# Altium PCB Power_Board.PcbDoc
Units mm, origin at the board's own origin, x right, y up, seen from the top; angles counter-clockwise.
Board outline 152.4 x 101.6 mm, 4 copper layers (Top Layer, Layer GND, Layer 12V, Bottom Layer), stack 0.603 mm thick; 28 components, 16 nets, 84 pads, 2 vias.
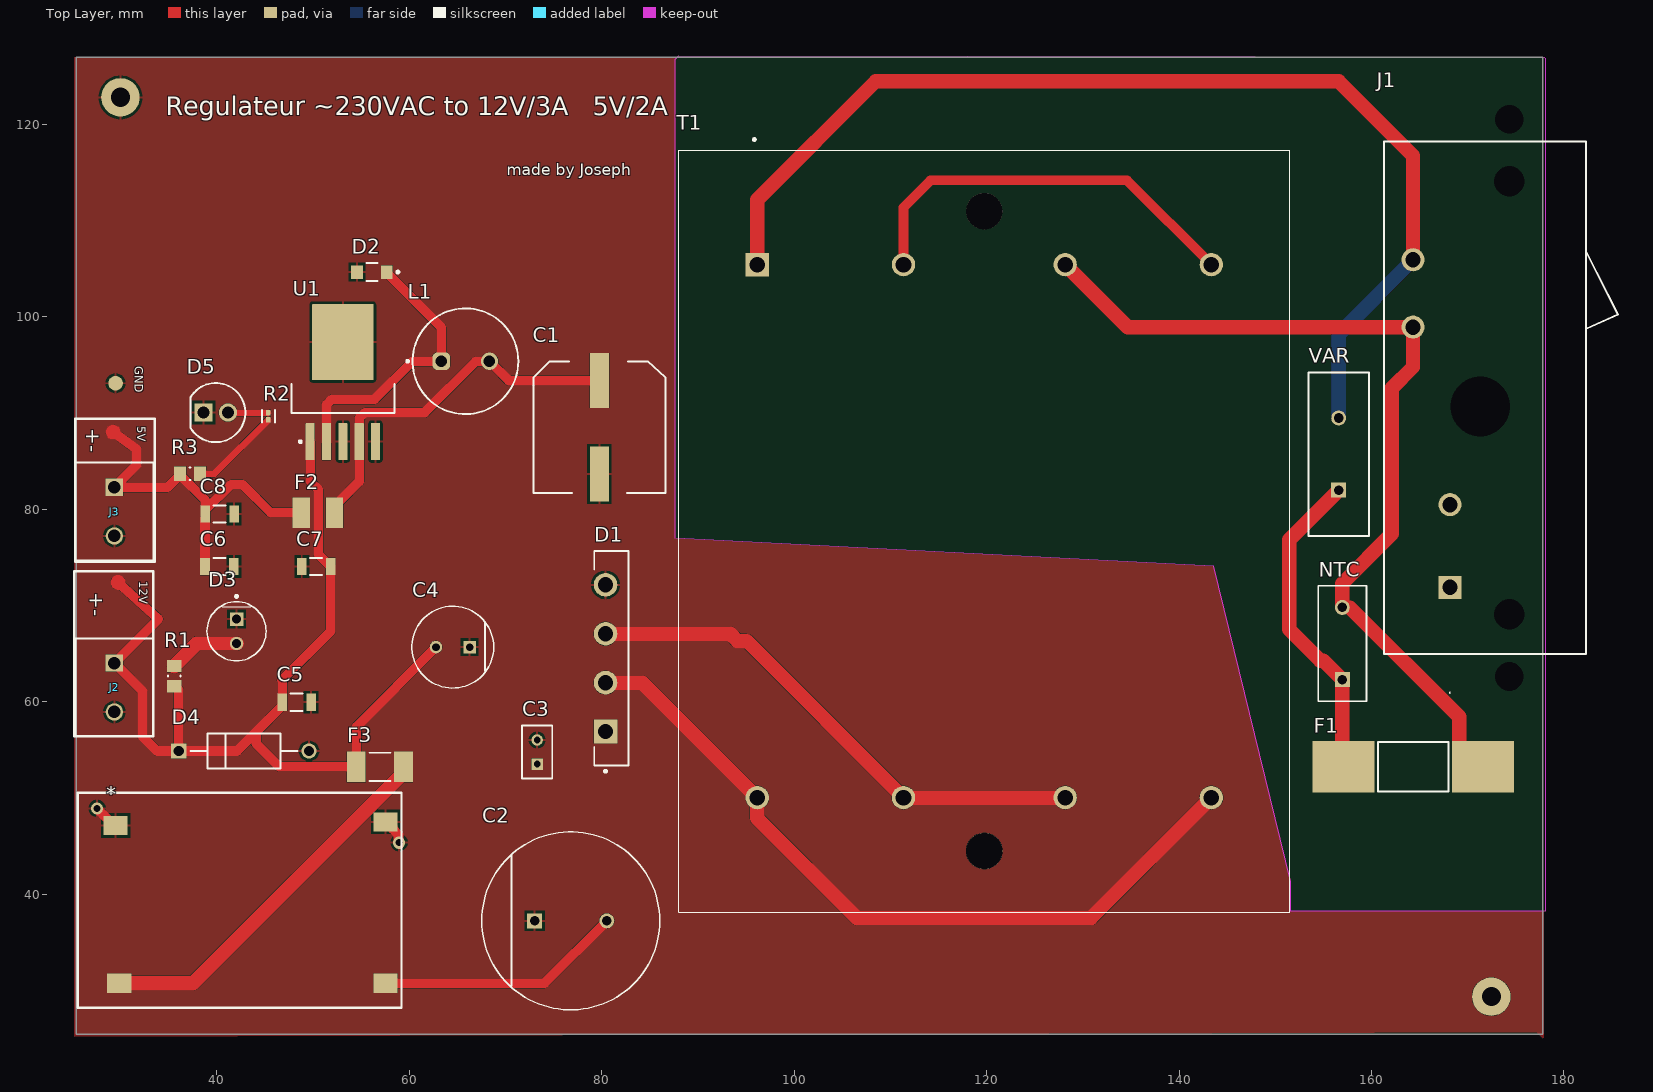
[diagram p0: Top Layer view]
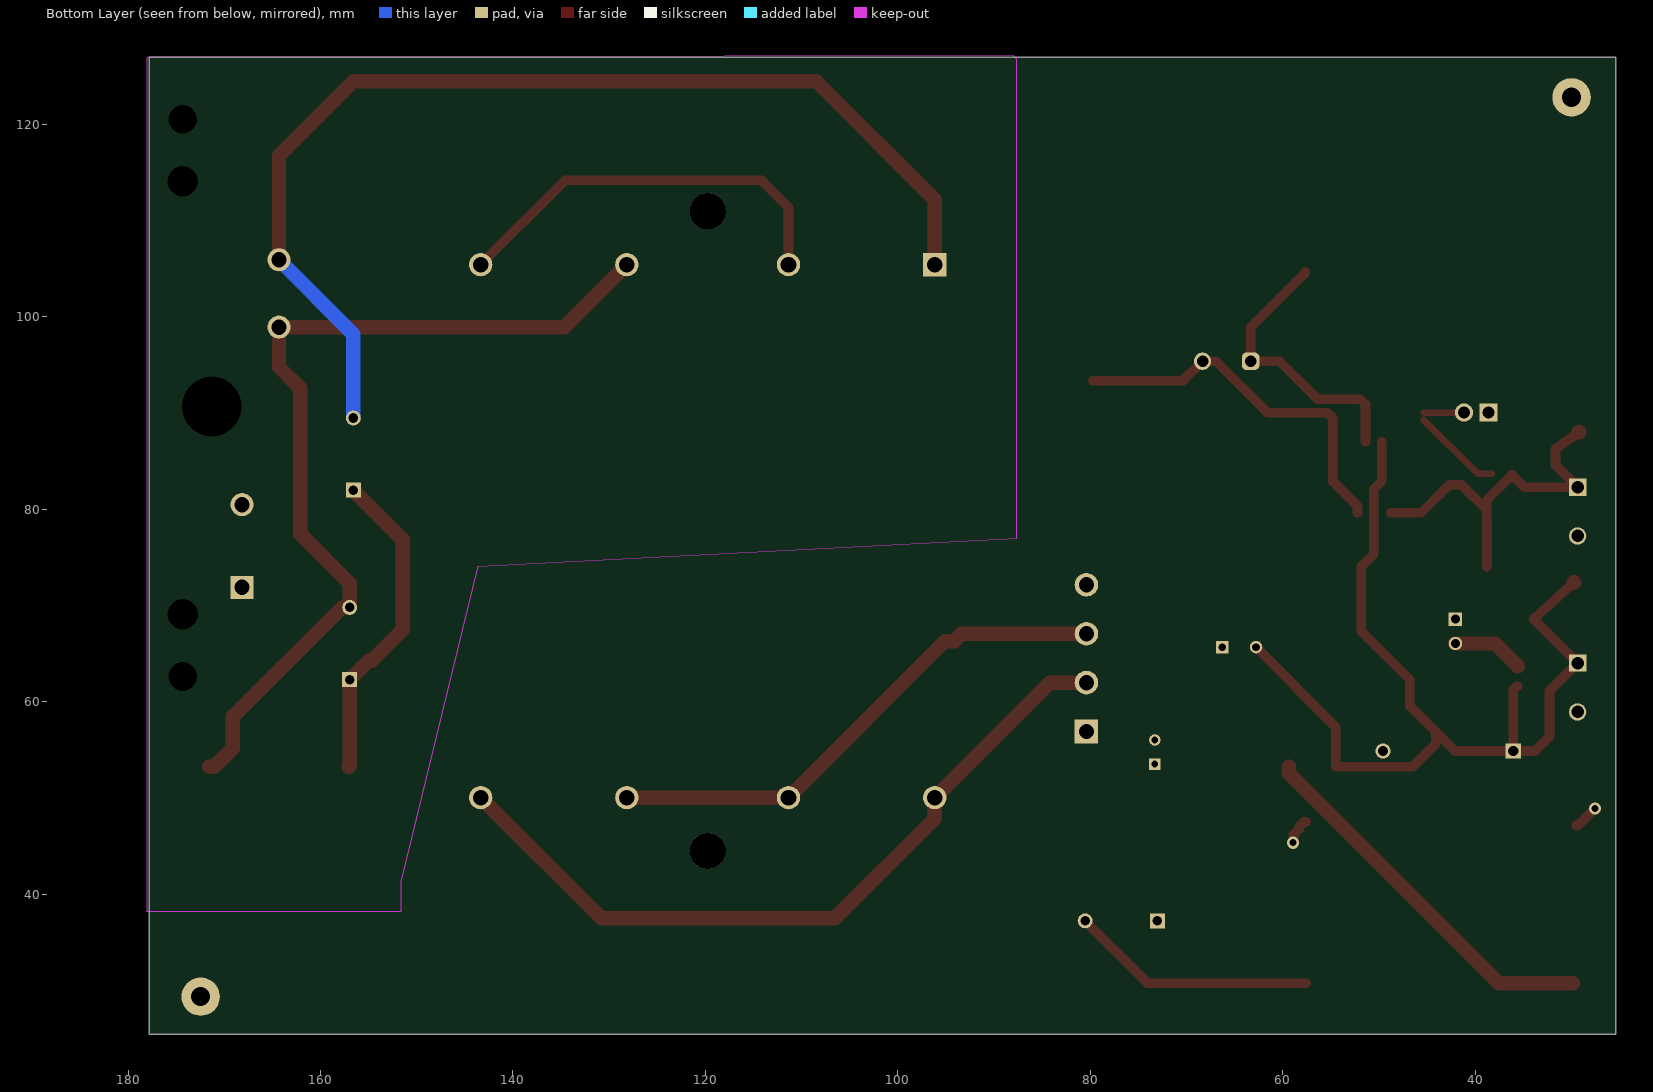
[diagram p1: Bottom Layer view, seen from below]
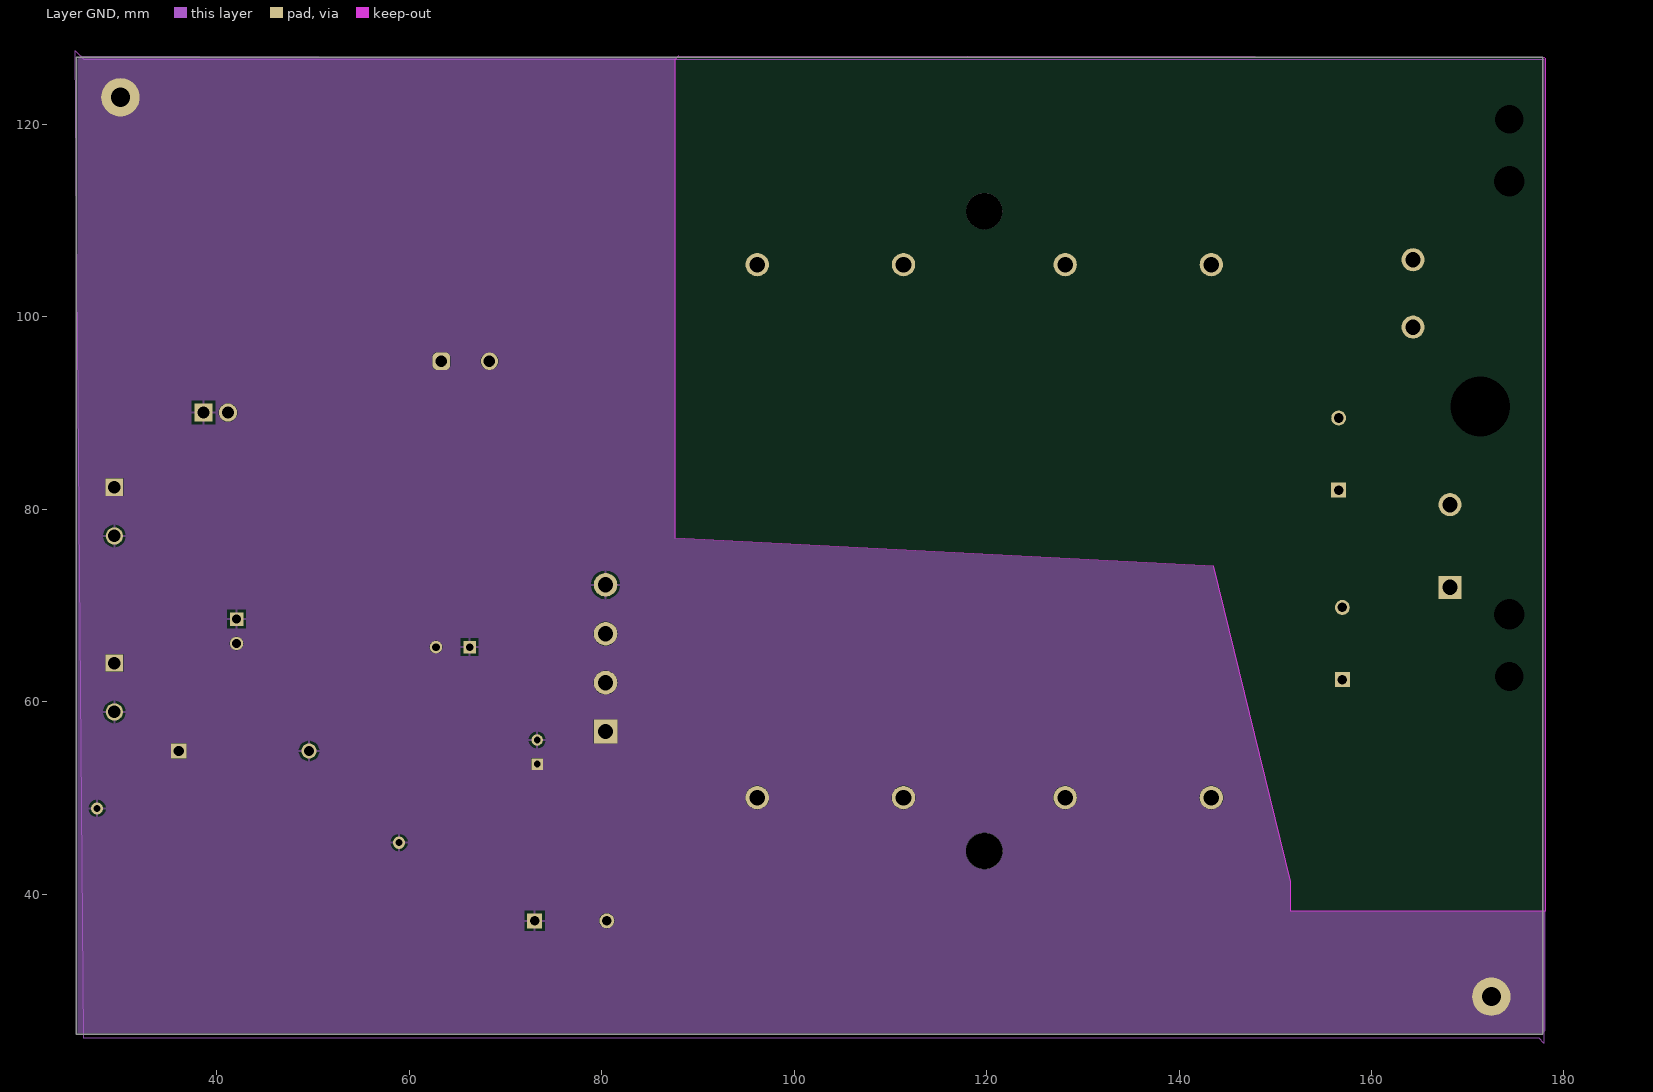
[diagram p2: Layer GND]
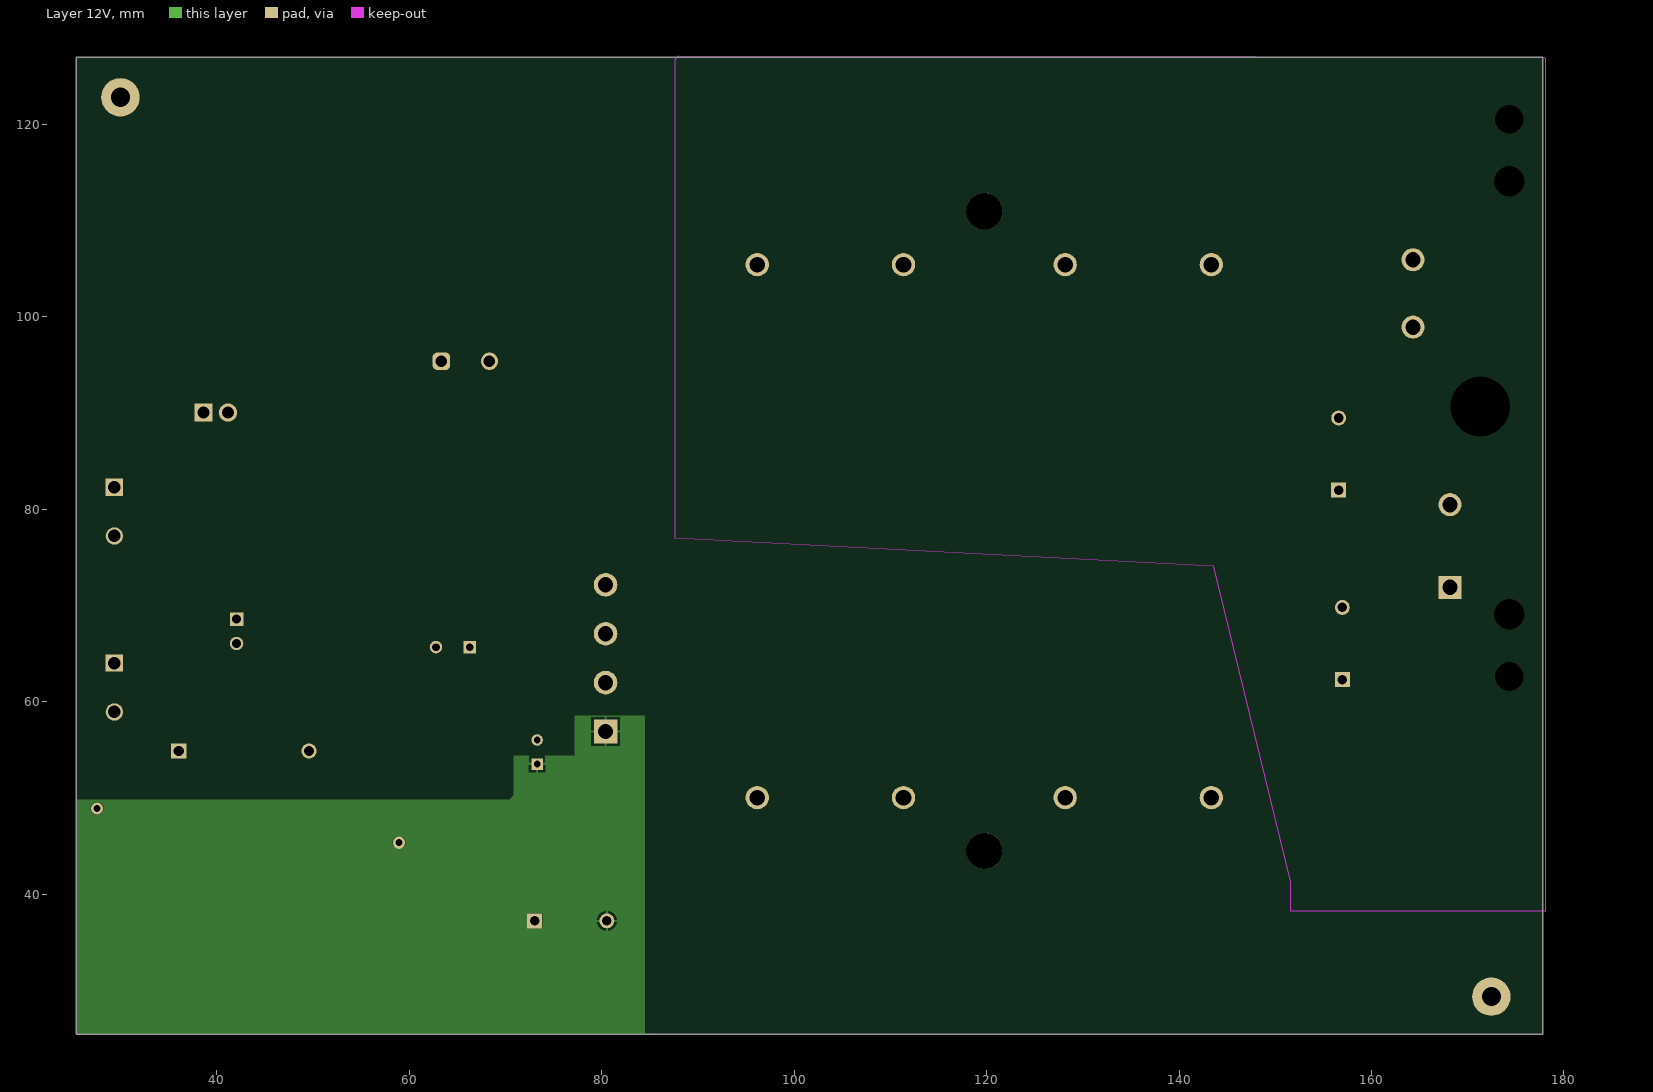
[diagram p3: Layer 12V]
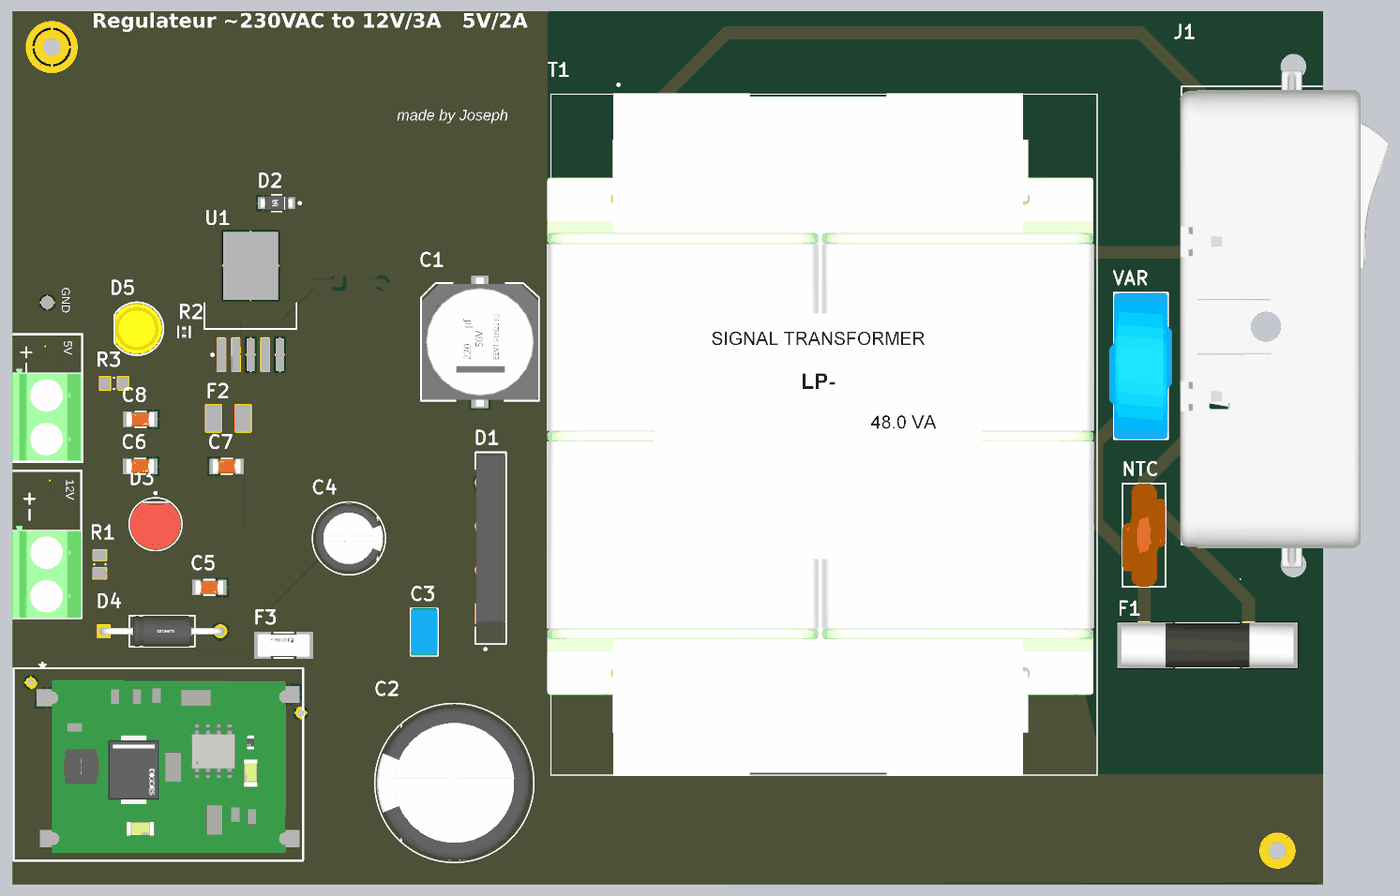
[diagram p4: 3D render of the assembled board from above, using the file's embedded part models]

## Layer stack, top to bottom
Top Solder: solder mask 0.0102, Solder Resist, Dk 3.5
Top Layer: signal copper 0.0356
Dielectric 2: prepreg 0.0711, PP-006, Dk 4.1
Layer GND: signal copper 0.035
Dielectric 1: dielectric 0.32, FR-4, Dk 4.8
Layer 12V: signal copper 0.035
Dielectric 3: prepreg 0.0711, PP-006, Dk 4.1
Bottom Layer: signal copper 0.0356
Bottom Solder: solder mask 0.0102, Solder Resist, Dk 3.5

## Board outline
25.4,25.4 177.8,25.4 177.8,127 25.4,127

## Design rules (kind name [scope] priority, off if disabled: settings)
Clearance "Clearance_L_N  " [InNet('L') vs InNet('N')] p1: gap=3 ignorepadtopadclearanceinfootprint=FALSE
Clearance "Clearance_MAINS  " [InNet('L')or InNet('N') vs NOT (InNet('L') OR InNet('N'))] p2: gap=4 ignorepadtopadclearanceinfootprint=FALSE
PolygonConnect [All] p1: connectstyle=Relief reliefconductorwidth=0.254 reliefentries=4 polygonreliefangle="90 Angle" airgapwidth=0.254
RoutingVias [All] p1: holewidth=0.711 width=1.27 viastyle="Through Hole" minholewidth=0.711 minwidth=1.27 maxholewidth=0.711 maxwidth=1.27
SolderMaskExpansion [All] p1: expansion=0.102 istentingtop=FALSE
Width Width_1 [InNet('+5V') OR InNet('+5VOUT')] p1: maxlimit=2 minlimit=1 preferedwidth=1.2
Width [InNet('+12VOUT') OR InNet('12VREG') OR InNet('+12VREG2')] p2: maxlimit=3 minlimit=1 preferedwidth=2
30 further rules are at their usual default settings.

## Components (designator, comment, footprint, x,y, rotation, side; value= is the part's Value field where it differs from the comment)
* "DC_DC_BUCK_12V_MP1584" DC_DC_BUCK_12V_MP1584 44.069,54.61 r180 top
C1 "EEVTG1H221Q" FP-TGH13-MFG 79.756,88.519 r90 top value=220uF
C2 "ECA1VHG472" FP-RAD-TH-D_18_0_5-L_35_5-MFG 76.775,37.211 r0 top
C3 "RHEL81H155K2A2H03B" FP-RHE2DB-MFG 73.279,54.757 r90 top
C4 "EEUFR1E221" FP-RAD-TH-D_8_0_5-L_11_5-MFG 64.516,65.659 r180 top
C5 "AC1206KKX7R0BB104" FP-AC1206-0_85-MFG 48.284,59.944 r0 top value="100 nF"
C6 "AC1206KKX7R0BB104" FP-AC1206-0_85-MFG 40.259,74.041 r0 top value="100 nF"
C7 "AC1206KKX7R0BB104" FP-AC1206-0_85-MFG 50.316,74.041 r180 top value="100 nF"
C8 "AC1206KKX7R0BB104" FP-AC1206-0_85-MFG 40.283,79.502 r0 top value="100 nF"
D1 "GBU4M-E3/51" FP-GBU4M-E3-51-MFG 80.998,64.516 r270 top
D2 "SS34LWHRVG" FP-SS34LWH-MFG 56.108,104.648 r180 top
D3 "XLUR12D" FP-XLUR12D-MFG 42.037,67.31 r270 top
D4 "TVS 15V" FP-DO-15-MFG 42.799,54.864 r0 top
D5 "SSL-LX5093YD" FP-SSL-LX5093YD-MFG 39.878,90.043 r0 top
F1 "021502.5MXP" LFUS-0215-20X5_L 164.338,53.213 r180 top
F2 "1812L150ZR" LFUS-FUSE1812-71_V 50.493,79.629 r180 top
F3 "0452004.MRL" FP-0452-MFG 56.934,53.213 r180 top value=0.0186Ω
J1 "CMF1.1111.12" CMF1111112 168.163,71.878 r90 top
J2 "1729128" PHOE-1729128-2_V 29.337,61.468 r270 top
J3 "1729128" PHOE-1729128-2_V 29.337,79.756 r270 top
L1 "7447471330" WE-TIS_1111 1335.826,1365.377 r0 top
NTC "NTPAA100LDNB0" FP-NTPAA-MFG 156.972,66.04 r90 top
R1 "3R3 5% 0805(2012)" RESC0805(2012)_M 35.56,62.645 r90 top value="3.30 Ohm"
R2 "0 OHM" FP-CRG0402-IPC_C 45.339,89.657 r90 top
R3 "3R3 5% 0805(2012)" RESC0805(2012)_M 37.211,83.693 r0 top value="3.30 Ohm"
T1 "LP-24-2000" XFMR_LP-24-2000 119.761,77.724 r90 top
U1 "LM2596S-5.0" KTT0005B_L 53.086,93.218 r90 top
VAR "IsoM5-275-B-L2" FP-IsoM5-275-B-L2-MFG 156.591,85.725 r90 top

## Footprints (in the part's own frame and the unit in brackets; to place one, negate y for a bottom-side part, rotate by r counter-clockwise, add the part's x,y. Pads: shape width x height; smd on the part's side, far side on the other; paste and mask are expansions set on the pad)
CMF1111112 [mm]
  rect 2.4x2.4 hole 1.6: 1(0,0)
  round 2.4 hole 1.6: 2(8.6,0) 3(27.05,3.84) 4(34.05,3.84)
  round 3.1 hole 6.2 unplated: 5(18.8,-3.16)
  round 1.5 hole 3 unplated: 6(-9.25,-6.16) 9(48.65,-6.16)
  round 1.6 hole 3.2 unplated: 7(-2.8,-6.16) 8(42.2,-6.16)
  silkscreen extent -11,-17.46 46.35,6.84, body extent -9.65,-17.27 48.25,7.03, height 18.5
DC_DC_BUCK_12V_MP1584 [mm]
  rect 2.5x2 smd mask+0: 1(-13.462,23.876) 2(-13.462,7.112) 3(14.224,23.876) 4(14.605,7.493)
  body extent -13.08,5.46 14.1,25.53, height 2.9
FP-0452-MFG [mil]
  rect 77x124 smd paste+0 mask+0: 1(-96.5,0) 2(96.5,0)
  silkscreen extent -43,-58 43,58, body extent -139,-66 139,66, height 10
FP-AC1206-0_85-MFG [mm]
  rect 1x1.8 smd paste+0 mask+0: 1(-1.5,0) 2(1.5,0)
  silkscreen extent -0.63,-0.9 0.63,0.9, body extent -2.2,-1.25 2.2,1.25, height 0.25
FP-CRG0402-IPC_C [mm]
  rect 0.56x0.472 smd paste+0 mask+0: 1(-0.376,0) 2(0.376,0)
  silkscreen extent -0.66,-0.67 0.66,0.67, body extent -0.76,-0.38 0.76,0.38, height 0.25
FP-DO-15-MFG [mm]
  rect 1.6x1.6 hole 1.05 paste-1000 mask+0: 1(-6.77,0)
  round 1.6 hole 1.05 paste-1000 mask+0: 2(6.77,0)
  silkscreen extent -5.57,-1.8 5.57,1.8, body extent -7.67,-1.9 7.67,1.9, height 0.25
FP-GBU4M-E3-51-MFG [mm]
  rect 2.45x2.45 hole 1.6 paste-1000 mask+0: 1(7.62,-0.607)
  round 2.45 hole 1.6 paste-1000 mask+0: 2(2.54,-0.607) 3(-2.54,-0.607) 4(-7.62,-0.607)
  silkscreen extent -11.15,-1.78 11.87,1.78, body extent -11.25,-1.93 11.25,1.88, height 0.25
FP-IsoM5-275-B-L2-MFG [mm]
  rect 1.55x1.55 hole 1 paste-1000 mask+0: 1(-3.75,0)
  round 1.55 hole 1 paste-1000 mask+0: 2(3.75,0)
  silkscreen extent -8.5,-3.15 8.5,3.15, body extent -8.6,-3.25 8.6,3.25, height 0.25
FP-NTPAA-MFG [mm]
  rect 1.55x1.55 hole 1 paste-1000 mask+0: 1(-3.75,0)
  round 1.55 hole 1 paste-1000 mask+0: 2(3.75,0)
  silkscreen extent -6,-2.5 6,2.5, body extent -6.1,-2.6 6.1,2.6, height 0.25
FP-RAD-TH-D_8_0_5-L_11_5-MFG [mm]
  rect 1.3x1.3 hole 0.8 paste-1000 mask+0: 1(-1.75,0)
  round 1.3 hole 0.8 paste-1000 mask+0: 2(1.75,0)
  silkscreen extent -4.25,-4.25 4.25,4.25, body extent -4.35,-4.35 4.35,4.35, height 0.25
FP-RAD-TH-D_18_0_5-L_35_5-MFG [mm]
  rect 1.55x1.55 hole 1 paste-1000 mask+0: 1(-3.75,0)
  round 1.55 hole 1 paste-1000 mask+0: 2(3.75,0)
  silkscreen extent -9.25,-9.25 9.25,9.25, body extent -9.35,-9.35 9.35,9.35, height 0.25
FP-RHE2DB-MFG [mm]
  rect 1.2x1.2 hole 0.7 paste-1000 mask+0: 1(-1.25,0)
  round 1.2 hole 0.7 paste-1000 mask+0: 2(1.25,0)
  silkscreen extent -2.75,-1.58 2.75,1.58, body extent -2.85,-1.68 2.85,1.68, height 0.25
FP-SS34LWH-MFG [mm]
  rect 1.2x1.4 smd paste+0 mask+0: 1(-1.55,0) 2(1.55,0)
  silkscreen extent -2.83,-0.95 0.58,0.95, body extent -2.25,-1.05 2.25,1.05, height 0.25
FP-SSL-LX5093YD-MFG [mm]
  rect 1.9x1.9 hole 1.25 paste-1000 mask+0: 1(-1.27,0)
  round 1.9 hole 1.25 paste-1000 mask+0: 2(1.27,0)
  silkscreen extent -2.63,-3.07 3.07,3.07, body extent -3.17,-3.17 3.17,3.17, height 0.25
FP-TGH13-MFG [mm]
  rect 5.7x2 smd paste+0 mask+0: 1(-4.85,0) 2(4.85,0)
  silkscreen extent -6.85,-6.85 6.85,6.85, body extent -7.95,-7.1 7.95,7.1, height 0.25
FP-XLUR12D-MFG [mm]
  rect 1.4x1.4 hole 0.9 paste-1000 mask+0: 1(-1.27,0)
  round 1.4 hole 0.9 paste-1000 mask+0: 2(1.27,0)
  silkscreen extent -3.75,-3.08 3.08,3.08, body extent -3.17,-3.17 3.17,3.17, height 0.25
KTT0005B_L [mm] "DPAK, 5-Leads, Body 10.65x9.65mm, Pitch 1.7mm, IPC High Density"
  rrect11% 3.85x0.95 smd: 1(-6.2,3.4) 2(-6.2,1.7) 3(-6.2,0) 4(-6.2,-1.7) 5(-6.2,-3.4)
  rrect2% 7.9x6.4 smd: 6(4.15,0)
  silkscreen extent -6.32,-5.35 -0.2,5.35, body extent -3.2,-5.32 6.45,5.33, height 4.83
LFUS-0215-20X5_L [mm] "MELF Resistor, 2-Leads, Body 20.5x5.3mm, IPC High Density"
  rect 6.45x5.35 smd: 1(-7.25,0) 2(7.25,0)
  silkscreen extent -3.65,-2.57 3.65,2.58, body extent -10,-2.58 10,2.58, height 5.15
LFUS-FUSE1812-71_V [mm] "Chip Fuse, Body 4.73x3.41mm, Height 0.71mm"
  rect 1.78x3.15 smd: 1(-1.725,0) 2(1.725,0)
  body extent -1.73,-1.57 1.73,1.57, height 0.71
PHOE-1729128-2_V [mm] "Receptacle, 2-Leads, Body 8.1x10.16mm, Pitch 5.08mm"
  rect 1.8x1.8 hole 1.3: 1(-2.54,0)
  round 1.8 hole 1.3: 2(2.54,0)
  silkscreen extent -5.08,-4.05 5.08,4.05, body extent -5.65,-4.05 5.08,4.05, height 10.01
RESC0805(2012)_M [mm] "Chip Resistor, Body 2.0x1.3mm, IPC Low Density"
  rect 1.25x1.5 smd: 1(-1.05,0) 2(1.05,0)
  silkscreen extent -0.05,-0.65 0.05,0.65, body extent -1.1,-0.67 1.1,0.67, height 0.7
WE-TIS_1111 [mm] "THT Shielded Radial Leaded Wire Wound Inductor, body diameter 11mm"
  rrect50% 1.8x1.8 hole 1.2: 1(-1272.5,-1270)
  round 1.8 hole 1.2: 2(-1267.5,-1270)
  silkscreen extent -1276.12,-1275.5 -1264.5,-1264.5, body extent -1275.3,-1275.3 -1264.7,-1264.7, height 10.6
XFMR_LP-24-2000 [mm]
  rect 2.43x2.43 / inner round 2.43 / far side rect 2.43x2.43 hole 1.62 mask+0.102: 1(27.7,23.6)
  round 2.43 hole 1.62 mask+0.102: 2(27.7,8.4) 3(27.7,-23.6) 4(27.7,-8.4) 5(-27.7,23.6) 6(-27.7,8.4) 7(-27.7,-23.6) 8(-27.7,-8.4)
  round 3.755 hole 3.755 unplated mask+0: ""(-33.25,0) ""(33.25,0)
  silkscreen extent -39.6,-31.75 40.8,31.75, body extent -39.69,-31.37 39.69,32.23, height 34.96

## Part data
C1: library part CMP-05427-000003-1, "CAP ALUM 220UF 20% 50V SMD", Capacitance=220uF, Leakage Current=1.1mA, Manufacturer="Panasonic Electronic Components", Package=TGH13, Ripple Current=600mA, Temperature="-40°C to +125°C", Temperature Range High=+125°C, Temperature Range Low=-40°C, Tolerance=20%, Voltage Rating=50V, Automotive=Yes, Automotive Grade="Grade 1", Category=Cap, ComponentLink2Description=Datasheet, ComponentLink2URL=https://industrial.panasonic.com/cdbs/www-data/pdf/RDE0000/ABA0000C1187.pdf, Device Class L1="Passive Components", Device Class L2=Capacitors, Device Class L3="Aluminum Electrolytic Capacitors", Digikey Description="CAP ALUM 220UF 20% 50V SMD", Dissipation Factor=14%, Esr=0.23Ω, Footprint Url=https://industrial.panasonic.com/cdbs/www-data/pdf/RDE0000/DME0000COL48.pdf, Height=14mm, Lead Free=Yes, Life=1000Hours, Manufacturer Part Number=EEVTG1H221Q, Material=Aluminum, Mouser Description="Aluminum Electrolytic Capacitors - SMD 220UF 50V TG SMD", Octopart=https://octopart.com/eev-tg1h221q-panasonic-39480853, RoHS=TRUE
C2: library part CMP-05427-001627-1, "Aluminum Electrolytic Capacitors (Radial Lead Type) AEC-Q200 Qualified 4700uF ±20% 35V", Capacitance=4.7mF, Case/Package=Radial, Leakage Current=3uA, Max Operating Temperature=105°C, Min Operating Temperature=-55°C, Package Quantity=50, Ripple Current=1.91A, Tolerance=20%, Voltage=35V, Construction=RADIAL, Contact Plating=Tin, Diameter=18mm, Dissipation Factor=0.2%, Features="General Purpose", Height=35.5mm, Height - Seated (Max)=1.398inch, Lead Diameter=0.8mm, Lead Pitch=7.5mm, Lead/Base Style=Straight, Length=35.5mm, Life (Hours)=2000Hour, Mount="Through Hole", Number of Pins=2, Packaging=Bulk, Radiation Hardening=No, REACH SVHC="No SVHC", Ripple Current (AC)=1.91A, RoHS Compliant=Yes, Series=NHG, Termination=Radial, Voltage Rating=35V, Voltage Rating (DC)=35V
C3: library part CMP-06035-050647-1, "Ceramic Capacitor Automotive 1.5uF ±10% 50V X8L Radial", Capacitance=1.5uF, Dielectric=X8L, Max Operating Temperature=150°C, Min Operating Temperature=-55°C, Tolerance=10%, Voltage Rating=50V, Lead Pitch=2.5mm, REACH SVHC="No SVHC", Voltage Rating (DC)=50V
C4: library part CMP-05427-000847-1, "Aluminum Electrolytic Capacitors (Radial Lead Type) 220uF ±20% 25V", Capacitance=220uF, Case/Package=Radial, Max Operating Temperature=105°C, Min Operating Temperature=-40°C, Ripple Current=950mA, Tolerance=20%, Voltage=25V, Construction=RADIAL, Contact Plating=Tin, Diameter=8mm, Height=11.5mm, Impedance=56mR, Lead Diameter=0.6mm, Lead Pitch=3.5mm, Life (Hours)=6000Hour, Mount="Through Hole", REACH SVHC=Yes, Ripple Current (AC)=950mA, RoHS Compliant=Yes, Series="FR Radial", Termination=Radial, Voltage Rating=25V, Voltage Rating (DC)=25V
C5 C6 C7 C8: library part CMP-03422-001145-1, "CAP CER 0.1UF 100V X7R 1206", Capacitance="100 nF", Manufacturer=Yageo, Package=AC1206-0.85, Temperature="-55°C to +125°C", Temperature Characteristic=X7R, Temperature Coefficient=15%, Temperature Range High=+125°C, Temperature Range Low=-55°C, Tolerance=0.1, Voltage Rating="100 V", Automotive=Yes, Automotive Grade="Grade 1", Category=Cap, ComponentLink2Description=Datasheet, ComponentLink2URL=http://www.yageo.com/documents/recent/UPY-AC_NP0X7R_16V-to-630V_12.pdf, Device Class L1="Passive Components", Device Class L2=Capacitors, Device Class L3="Ceramic Capacitors", Digikey Description="CAP CER 0.1UF 100V X7R 1206", Footprint Url=http://www.yageo.com/exep/pages/download/literatures/UPY-C_GEN_24.pdf, Height=0.95mm, Ipc Land Pattern Name=CAPC320160X85, Lead Free=Yes, Manufacturer Part Number=AC1206KKX7R0BB104, Material=Ceramic, Octopart=https://octopart.com/ac1206kkx7r0bb104-yageo-75666120, RoHS=TRUE
D1: library part CMP-13193-000001-1, "BRIDGE RECT 1PHASE 1KV 3A GBU", Average Rectified Current=3A, Case/Package=SIP, Forward Current=4A, Forward Voltage=1V, Max Forward Surge Current (Ifsm)=150A, Max Operating Temperature=150°C, Max Repetitive Reverse Voltage (Vrrm)=1kV, Max Reverse Current=5uA, Min Operating Temperature=-55°C, Package Quantity=250, Element Configuration=Single, Height=18.8mm, Lead Free="Lead Free", Length=22.3mm, Max Reverse Leakage Current=5uA, Max Surge Current=150A, Mount="Through Hole", Number of Elements=1, Number of Pins=4, Packaging=Bulk, Peak Non-Repetitive Surge Current=150A, Radiation Hardening=No, RoHS Compliant=Yes, Series=-, Width=3.56mm
D2: library part CMP-15604-000001-1, "DIODE SCHOTTKY 40V 3A SOD123W", RoHS Compliant=Yes
D3: library part CMP-02085-08376351-1, "627nm Red LED; 5x8.6mm, Through-Hole Mount with Red Diffused Round Lamp", Case/Package=Radial, Color=Red, Forward Voltage=1.9V, Test Current=10mA, Dominant Wavelength=617nm, Height=8.6mm, Lens Color=Red, Lens Transparency=Diffused, Lifecycle Status=Production, Luminous Intensity=39mcd, Mount="Through Hole", RoHS=Compliant, Viewing Angle=30°, Wavelength=627nm
D4: library part CMP-00278-00112159-1, "P6KE15A 600 Watt SUR40 Transient Voltage Suppressor, 15 V, Unidirectional", Breakdown Voltage=14.3V, Capacitance=1.6pF, Case/Package=DO-15, Clamping Voltage=21.2V, Current Rating=28A, Leakage Current=5µA, Max Breakdown Voltage=15.8V, Max Operating Temperature=150°C, Max Power Dissipation=600W, Min Operating Temperature=-55°C, Operating Supply Voltage=12.8V, Power Line Protection=No, Test Current=1mA, Voltage Rating (DC)=15V, Composition=Zener, Diameter=3.56mm, Direction=Unidirectional, Element Configuration=Single, ESD Protection=No, Height=3.56mm, Lead Free="Lead Free", Length=6.75mm, Max Reverse Leakage Current=5µA, Max Surge Current=28A, Min Breakdown Voltage=14.3V, Mount="Through Hole", NexarPartId=112159, Number of Channels=1, Number of Elements=1, Number of Pins=2, Number of Unidirectional Channels=1, Packaging=Bulk, Peak Pulse Current=28A, Peak Pulse Power=600W, Polarity=Unidirectional, Power Dissipation=600W, Power Rating=600W, Radiation Hardening=No, REACH SVHC="No SVHC", Reverse Breakdown Voltage=14.3V, Reverse Standoff Voltage=12.8V, RoHS=Compliant, Termination=Axial, Weight=300mg, Width=3.56mm
D5: library part CMP-57192-000007-1, "LED YELLOW DIFFUSED T-1 3/4 T/H", Case/Package=Radial, Color=Yellow, Forward Current=20mA, Forward Voltage=2.1V, Max Operating Temperature=85°C, Min Operating Temperature=-40°C, Package Quantity=1000, Diameter=5mm, Dominant Wavelength=568nm, Height=8.6mm, Illumination Color=Yellow, Lead Free="Lead Free", Length=0.5inch, Lens Color=Yellow, Lens Style=Dome, Lens Transparency=Diffused, Luminous Intensity=30mcd, Mount="Through Hole", Number of LEDs=1, Number of Pins=2, Packaging=Bulk, REACH SVHC="No SVHC", RoHS Compliant=Yes, Series=-, Test Current=20mA, Viewing Angle=60°, Wavelength=585nm, Weight=0.01lb, Width=1.5inch
F1: library part CMP-2000-05620-1, "Time-Lag Type Cartridge Fuse, 2.5 A, 0.00386 Ohm, 250 V, -55 to 125 degC, 2-Pin SMD, RoHS, Bulk", Current Rating=2.5A, Manufacturer=Littelfuse, Operating Temp Range=-55to+125°C, Package Description="2-Pin Surface Mount Device, Body 20 x 5.15 mm", Package Reference=0215-20X5, Working Voltage-Max=250V, Datasheet URL=http://www.littelfuse.com/~/media/electronics/datasheets/fuses/littelfuse_fuse_215_datasheet.pdf.pdf, Datasheet Version=05/2016, Manufacturer URL=http://www.littelfuse.com/, Mounting Technology=SurfaceMount, Response Characteristic=TimeLag, Size=5x20mm
F2: library part CMP-0257-00001-1, "Resettable PTC, 1812, 1.5 A Ihold, 3.0 A Itrip", ComponentLink1Description="Manufacturer URL", ComponentLink1URL=http://www.littelfuse.com/, ComponentLink2Description=Datasheet, ComponentLink2URL=http://www.littelfuse.com/products/resettable-ptcs/surface-mount/1812l/~/media/Electronics_Technical/Datasheets/Resettable_PTCs/Littelfuse_PTC_1812L_Datasheet.pdf, DatasheetVersion=6/2012, Ihold="1.5 A", Imax="100 A", Itrip="3 A", PackageDescription="2-Pin SMT Fuse, 4.55 x 3.24 mm Body", PackageReference=FUSE1812-71, PackageVersion=6/2012, PartNumber=1812L150ZR, Vmax="8 Vdc"
F3: library part CMP-08605-000077-1, "FUSE BRD MNT 4A 125VAC/VDC 2SMD", Fuse Current=4A, Fuse Interrupt Ac Current=50A, Fuse Interrupt Dc Current=300A, Manufacturer="Littelfuse Inc", Max Fuse Ac Voltage=125V, Package=0452, Resistance=0.0186Ω, Temperature="-55°C to +125°C", Temperature Range High=+125°C, Temperature Range Low=-55°C, Automotive=No, Category=Fuse, ComponentLink2Description=Datasheet, ComponentLink2URL=https://www.littelfuse.com/~/media/electronics/datasheets/fuses/littelfuse_fuse_452_454_datasheet.pdf.pdf, Device Class L1="Circuit Protection", Device Class L2=Fuses, Device Class L3=unset, Digikey Description="FUSE BRD MNT 4A 125VAC/VDC 2SMD", Fuse Blow Speed=Slow, Fuse I2T=34.4A2Sec, Height=2.94mm, Lead Free=Yes, Manufacturer Part Number=0452004.MRL, Max Fuse Dc Voltage=125V, Mouser Description="Surface Mount Fuses 125V 4A", Octopart=https://octopart.com/0452004.mrl-littelfuse-566421, RoHS=TRUE, Voltage Rating=125V
J1: "CAD-model shows appliance inlet with PCB-terminals only, with line switch marking 0/1, snap-in mounting on PCB and fixation with screw to the centre position from the top, with rear-side insulation cover.", Manufacturer_Name=SCHURTER, Mouser Part Number=693-CMF1.1111.12, Datasheet Link=https://www.schurter.com/en/datasheet/typ_CMF1.pdf, Geometry.Height=18mm, Manufacturer_Part_Number=CMF1.1111.12, Mouser Price/Stock=https://www.mouser.co.uk/ProductDetail/Schurter/CMF1111112?qs=%2F0Eb3QIYuIbNncoXboECMA%3D%3D
J2 J3: library part CMP-2000-05815-1, "PCB Terminal Block, 13.5 A, 400 V, 2-Pin THD, RoHS, Bulk", Current Rating=13500mA, Manufacturer="Phoenix Contact", Package Description="2-Pin Through Hole Device, Body 8.1 x 10.16 mm, Pitch 5.08 mm", Package Reference=1729128-2, Package Version=03/2015, Voltage Rating=400V, Datasheet URL=https://datasheet.ciiva.com/16046/1729128-16046181.pdf, Datasheet Version=12/2013, Manufacturer URL=http://www.phoenixcontact.com/, Mounting Technology=ThroughHole, No. of Positions=2, No. of Rows=1, Orientation=Horizontal, Package URL=https://www.phoenixcontact.com/online/portal/pi/pxc/product_detail_page/!ut/p/b1/3VdJjqNKFDxLH8AFycySyWY2ozFsEPOMMQaDOX1XedGL_1Vdm5YXJleknhSKeBkvI6EA8ncAo3AYoDhBQGco6KN7VURTdemj9us_IEKEZo_YHiPAEWEFmDGOHMORkqKYCORBZxgL7ZoaZYcbFFUZ3fqxSY6GOuxydWUuHqz1ynmMFygu583Bob0Ewr6Sd_l-5m-kAueHiB0jpRwZwe58wwtkpxtMYd_LmGcDRU02dRNEyWt6Y2ti5pSyJ_reIkzIulrqApdnbT11V5jnCKbYNCvhEM1MCpPByat_X379-iThf08CI5GfOPqfBeS3BRoBOdD55AKVv0iLwCMq-2BrzXWSGRH7pUGD9uwXQjiph3xL0DKQwdGa0JImiIOmBNOestqgwTHSSs2oOep-78apyXQBvNi8ZLaFjvjWvcaUEBu0MC6Wbe-d6mB0FAebo2lUWinqYaZs5DAYzV0RP9yitUjnGJ0iI9xhZkT42OCQNUJJhkgWINNQLP2JFP6OpMg3JCVg70jqHT0lvKOnhHf0lPuOnnLf0VPuWx6_dxwUIvwk5WMkT0kLL1mh61l2yZVSzG3pYV_bqo-mj6uMKwKwdnnW8Jh5RTOJzMOA5c-eJDaZQw4mTMPH02PvS_ZAqNVjVTo2WyYLkwH_KU1mmmG5kjRhDqPXLwwVHvVOjCM60-fpXvTDfMGW1PVFVS1r4e4yVDk4ZdNbkUHvqPqQSeian4UD39fNKmachqdJ1NJbyk8rXT9mXTvPk3oE5meulKGgiruPJek-4I9hTT6G8ZLOyRSm2RRVbThERQad5OS28hdt4YW4vG0stgYYzsWsK4_7y6DZMjJSCqri1kyiZR5vD7pwIrNR7QwPHTcLTI5qT7eRlpHrdGiupYlqQDJ7zy_CND8fWWBoLRXxk1RVcXiBQwbTD4Xi7KL-FuO94t9xaqweXzH, Packing=Bulk, PartNumber=1729128, Pitch=5.08mm, RoHS=TRUE
L1: library part CMP-1406-00003-3, "Inductor Power Shielded Wirewound 33uH 20% 1KHz Ferrite 3.6A 61mOhm DCR RDL Tray", Ambient Temperature Range High=85°C, Ambient Temperature Range Low=-40°C, Case/Package=Radial, Current Rating=3A, DC Resistance (DCR)=57mΩ, Frequency=10MHz, Inductance=33µH, Inductance Tolerance=20%, Max DC Current=3.6A, Max Operating Temperature=125°C, Saturation Current=2.8A, Series Resistance=50mΩ, Test Frequency=1kHz, Core Material=Ferrite, Diameter=11mm, Features=Shielded, Height=11.5mm, Lead Diameter=650µm, Lead Pitch=5mm, Length=11mm, Min Operating Temperature=-40°C, Mount="Radial, Through Hole", Number of Pins=2, REACH SVHC=Unknown, RMS Current (Irms)=3.6A, RoHS=Compliant, Self Resonant Frequency=10MHz, Shielding=Shielded, Tolerance=20%, Width=11mm
NTC: library part CMP-06022-000465-1, "ICL 10 OHM 15% 1.7A 10MM", Current Rating=1.7A, Max Operating Temperature=160°C, Min Operating Temperature=-20°C, Tolerance=15%, Depth=5mm, Diameter=0.394inch, Lead Free="Lead Free", Lead Pitch=0.295inch, Mount="Through Hole", Number of Pins=2, Packaging=Bulk, Radiation Hardening=No, Thickness=5mm
R1 R3: library part CMP-1013-00014-1, "3R3 0.125W 5% 0805 (2012 Metric)  SMD", Case-EIA=0805, Case-Metric=2012, Power="0.125 W", Tolerance="5 %", Technology=SMT
R2: library part CMP-03211-011400-1, "RES SMD 0 OHM JUMPER 1/16W 0402", Case Code (Imperial)=0402, Case Code (Metric)=1005, Insulation Resistance=1GR, Max Operating Temperature=125°C, Min Operating Temperature=-55°C, Number of Resistors=1, Package Quantity=10000, Power Rating=63mW, Resistance=0mR, Resistor Type="Thick Film", Temperature Coefficient=200ppm/°C, Tolerance=0%, Voltage Rating=50V, Case/Package=0402, Depth=0.5mm, ELV=Compliant, Height=0.35mm, Length=1mm, Mount="Surface Mount", Number of Pins=2, Number of Terminations=2, Packaging="Tape and Reel", Radiation Hardening=No, RoHS Compliant=Yes, Series=CRG, Technology="THICK FILM", Termination=Solder, Voltage Rating (DC)=50V, Weight=2.3E-05oz, Width=0.5mm
T1: "Flat Head Low Profile Transformer", Package=None, Check_prices=https://www.snapeda.com/parts/LP-24-2000/Signal+Transformer/view-part/?ref=eda, MF="Signal Transformer", MP=LP-24-2000, SnapEDA_Link=https://www.snapeda.com/parts/LP-24-2000/Signal+Transformer/view-part/?ref=snap
U1: library part CMP-0069-00270-3, "SIMPLE SWITCHER® Power Converter 150 KHz 3A Step-Down Voltage Regulator, 5-pin TO-263", Manufacturer="Texas Instruments", PackageTopMarking="NSUZXYTTE#*LM2596S*-5.0 P+", PowerWise=N, Code_JEDEC=MO-169-AB, ComponentLink1Description="Datasheet URL", ComponentLink1URL=http://www.ti.com/general/docs/lit/getliterature.tsp?genericPartNumber=LM2596&fileType=pdf, CompType=Switcher, PackageDescription="TO-263, Molded, .400 x .390 x .180in, 5 Lead, .067in Pitch, Surface Mount", PackageReference=KTT0005B, PinCount=5, RoHS=N
VAR: library part CMP-07402-000023-1, "ISOMOV 5KA 275VRMS BULK IN-LINE"

## Free pads (board coordinates)
  round 0.025 smd: 2(29.718,72.39) 4(29.21,88.011)
  round 1.524 smd: 3(29.464,93.091)
  round 4 hole 2 mask+1.02: 6(29.972,122.809)
  round 4 hole 2: 6(172.466,29.337)

## Via types
v1: diameter 1.27, hole 0.711, Top Layer to Bottom Layer, 2 vias

## Nets (pads, with @x,y where several pads share a name; then routed paths per layer and width w, separated by ;. In a path a pad name is that pad's centre, name@x,y a point inside that pad or via, vN(x,y) a via of type N, cw(c..) or ccw(c..) an arc to the next point about the centre after c; other vN are vias at no path point)
12VREG: *.1 C2.2 C3.1 D1.1 | length 25.7
  Top Layer w1: *.1 74.048,30.734 C2.2
+5V: C1.2 F2.1 L1.2 U1.4 | length 39.1
  Top Layer w1: F2.1 52.218,80.314 54.786,82.882 54.786,89.457 55.372,90.043 61.595,90.043 66.929,95.377 L1.2 70.334,93.369 C1.2
+5VOUT: C6.1 C8.1 F2.2 J3.1 pad.4 R3.1 | length 38.2
  Top Layer w1: pad.4 31.632,86.242 31.632,84.591 J3.1 34.889,82.296 36.161,83.568 38.783,80.946 C8.1@38.783,79.902 ; C6.1 38.759,79.078 38.783,79.102 C8.1 C8.1@38.783,79.902 ; F2.2 45.593,79.629 42.666,82.556 41.437,82.556 C8.1@38.783,79.902
+12VOUT: C4.2 C5.1 C7.1 D4.1 F3.2 J2.1 pad.2 R1.1 U1.1 | length 104
  Top Layer w1: pad.2 33.909,68.58 J2.1 32.258,61.087 32.258,56.388 33.782,54.864 D4.1 ; R1.1 35.685,61.595 36.029,61.251 D4.1 ; U1.1 49.686,82.902 50.546,82.042 50.546,75.311 C7.1 51.816,67.31 46.736,62.23 46.784,62.182 C5.1 46.784,59.544 44.069,56.829 ; C4.2 54.483,57.376 F3.2 46.482,53.213 44.069,55.626 44.069,56.829 ; D4.1 42.104,54.864 44.069,56.829
+12VREG2: *.3 F3.1 | length 39.2
  Top Layer w1.5: *.3 37.503,30.734 59.385,52.616 F3.1
L: F1.1 J1.3 NTC.2 T1.4 | length 93.7
  Top Layer w1.5: T1.4 134.657,98.928 J1.3 164.323,94.78 162.116,92.573 162.116,77.432 156.947,72.263 156.962,72.248 156.962,69.8 NTC.2 ; 157.749,69.78 169.113,58.417 169.113,55.138 171.038,53.213 F1.1
N: J1.4 T1.1 VAR.2 | length 113.7
  Top Layer w1.5: T1.1 96.161,112.163 108.458,124.46 156.591,124.46 164.323,116.728 J1.4
  Bottom Layer w1.5: VAR.2 156.591,98.196 J1.4
NetD1_2: D1.2 T1.5 T1.7 | length 79.6
  Top Layer w1.5: D1.2 84.209,61.976 T1.5 96.161,47.857 106.553,37.465 130.802,37.465 T1.7
NetD1_3: D1.3 T1.6 T1.8 | length 54.8
  Top Layer w1.5: D1.3 93.345,67.056 94.106,66.295 95.09,66.295 T1.6 T1.8
NetD2_1: D2.1 L1.1 U1.2 | length 29.3
  Top Layer w1: U1.2 51.386,90.854 51.972,91.44 56.388,91.44 60.325,95.377 L1.1 63.326,98.88 57.658,104.548 D2.1
NetD3_2: D3.2 R1.2 | length 7.4
  Top Layer w1.5: R1.2 37.905,66.04 D3.2
NetD5_2: D5.2 R2.2 | length 4.2
  Top Layer w0.7: D5.2 41.158,90.033 R2.2
NetF1_2: F1.2 NTC.1 VAR.1 | length 33.4
  Top Layer w1.5: VAR.1 151.447,76.831 151.447,67.501 154.683,64.265 154.997,64.265 NTC.1 156.972,53.329 F1.2
NetR2_1: R2.1 R3.2 | length 9.4
  Top Layer w0.7: R3.2 39.751,83.693 R2.1
PGND: *.2 *.4 C1.1 C2.1 C3.2 C4.1 C5.2 C6.2 C7.2 C8.2 D1.4 D2.2 D3.1 D4.2 D5.1 J2.2 J3.2 pad.3 pad.6@29.972,122.809 U1.3 U1.5 U1.6 | length 5.5
  Top Layer w1: v1(27.541,48.895) 29.32,47.117 *.4 ; *.2 57.781,47.498 58.281,46.998 58.281,46.748 58.876,46.153 58.876,45.391 v1(58.928,45.339)
PRI_STRAP: T1.2 T1.3 | length 42.7
  Top Layer w1: T1.2 111.361,111.361 114.173,114.173 134.612,114.173 T1.3
pads on no net: J1.1 J1.2 J1.5 J1.6 J1.7 J1.8 J1.9 T1.

## Polygon pours and split planes (outlines as drawn)
PGND on Layer GND "PGND_L02_P005" (solid, remove dead copper, pour order 5): 25.908,127.127 25.527,126.746 25.527,25.527 177.8,25.527 178.054,25.781 178.054,126.492
PGND on Layer GND "NONET_L02_P000" (solid, remove dead copper, shelved, pour order 0): 25.273,127.635 26.162,126.746 177.927,126.746 177.927,24.511 177.419,25.019 26.162,25.019
12VREG on Layer 12V "12VREG_L03_P004" (solid, remove dead copper, pour order 4): 77.216,58.547 84.455,58.547 84.455,25.4 25.4,25.4 25.4,49.784 70.358,49.784 70.866,50.292 70.866,54.356 77.089,54.356 77.216,54.229
PGND on Top Layer "PGND_L01_P006" (solid, pour order 6): 25.146,127 177.927,127 177.927,24.892 177.165,25.654 25.146,25.146

## Keep-outs
Keep-Out Layer:
  region: 177.927,127 178.054,126.873 178.054,38.227 151.638,38.227 151.638,41.275 143.625,74.077 87.63,76.962 87.63,126.746 88.011,127.127

## Other copper
Top Layer:
  region net +5VOUT: 28.448,88.011 ccw(c29.21,88.011) 29.21,87.249 ccw(c29.21,88.011) 29.972,88.011 ccw(c29.21,88.011) 29.21,88.773 ccw(c29.21,88.011)
  region net +12VOUT: 28.956,72.39 ccw(c29.718,72.39) 29.718,71.628 ccw(c29.718,72.39) 30.48,72.39 ccw(c29.718,72.39) 29.718,73.152 ccw(c29.718,72.39)

## Silkscreen, mask and mechanical layers (free items; w line width, h text height)
Top Overlay:
  lines w0.254: 25.146,56.388 33.401,56.388 33.401,73.533 25.146,73.533 25.146,56.388 ; 25.273,74.549 33.528,74.549 33.528,89.408 25.273,89.408 25.273,74.549 ; 25.527,28.194 59.182,28.194 59.182,50.546 25.527,50.546 25.527,28.194
  text "Regulateur ~230VAC to 12V/3A   5V/2A" at 34.671,120.269 h3.3
  text "made by Joseph" at 70.104,114.297 h2
  text "GND" at 31.132,94.869 h1.52 r270
  text "5V" at 31.386,88.646 h1.52 r270
  text "+-" at 26.418,88.392 h1.51 r270
  text "12V" at 31.623,72.517 h1.52 r270
  text "+-" at 26.799,71.374 h1.51 r270